# EAGLE board PATHS 1.1 PCB2 (EAGLE 6.5.0)
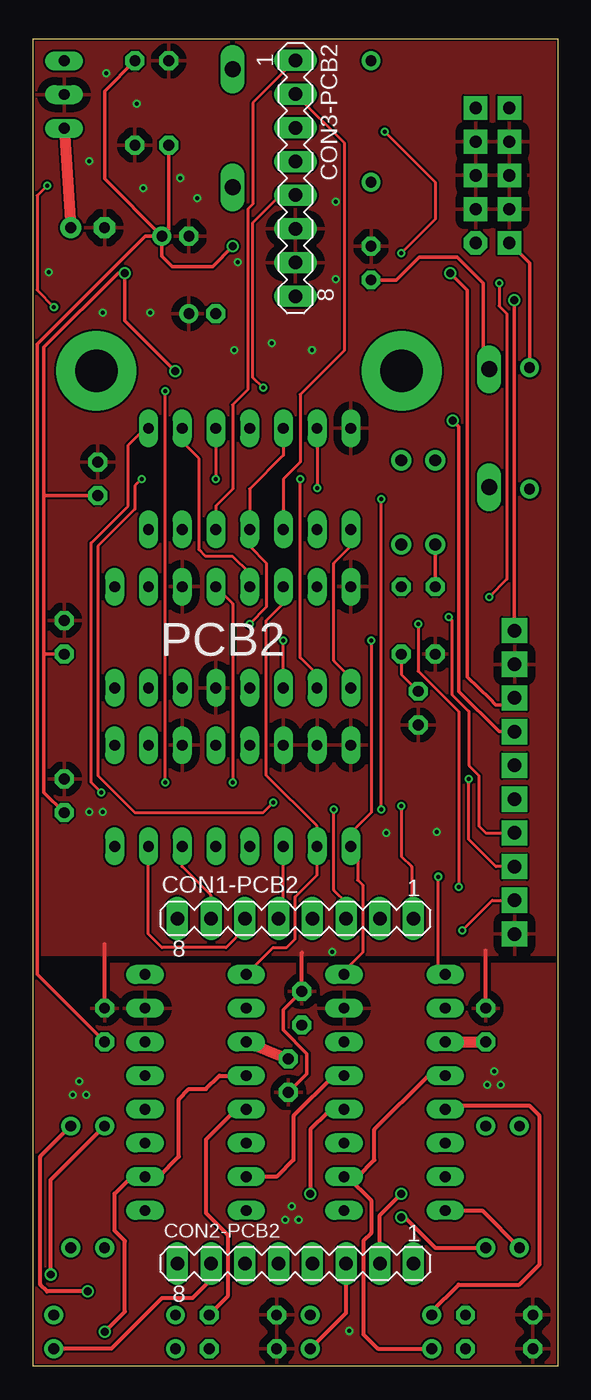
[diagram p0: board, top side]
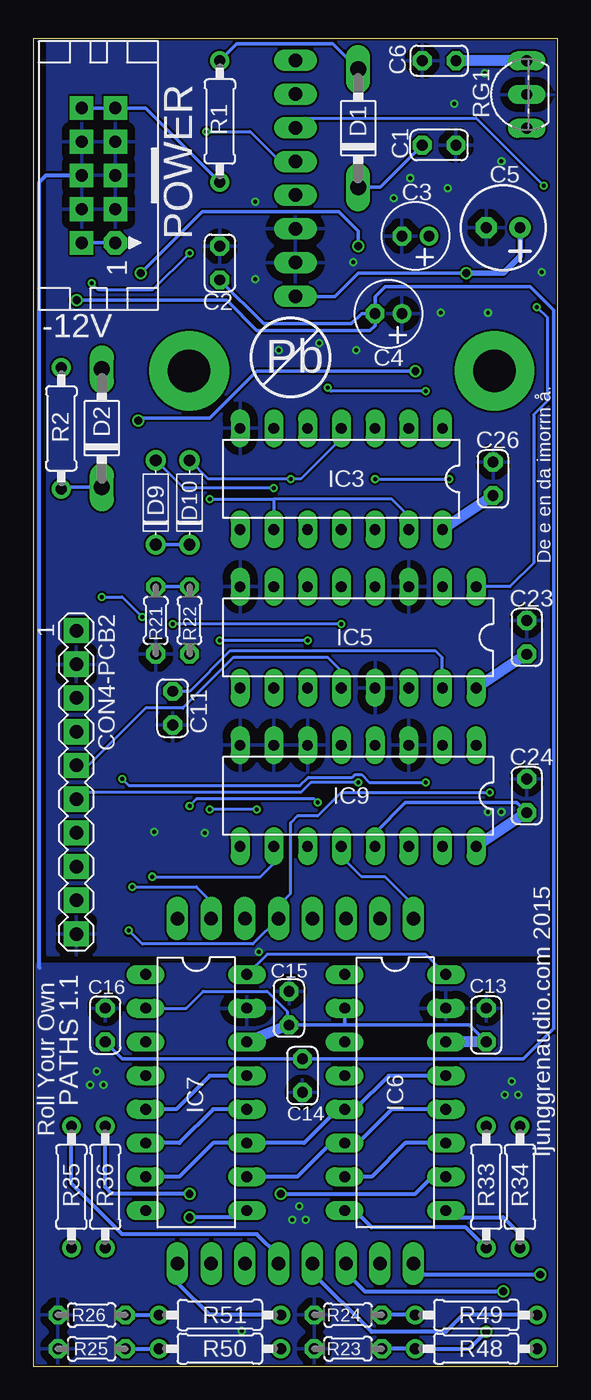
[diagram p1: board, bottom side, seen from below]

Size 39.5 x 100 mm. Coordinates in mm from the lower left corner, seen from the top.
Outline: 39.5,100 39.5,0 0,0 0,100 39.5,100
Copper layers (1*16): Top 0.035mm / dielectric 1.5mm / Bottom 0.035mm
Design rules "hackvana 12 mil pads 24 mil thermal": minimum track width 6mil, minimum drill 0.3mm, track to track 6mil, track to pad 6mil, pad to pad 6mil, via to via 6mil, smd to smd 0mil, copper to edge 6mil, drill to drill 6mil, minimum pad ring 12mil, minimum via ring 6mil, stop-mask expansion 2mil, vias tented up to drill 100mil, thermal gap 24mil
tRestrict: area 4.2,25.8 to 6.6,28.2; area 19,27.1 to 21.4,29.4; area 18,19.4 to 20.4,21.8; area 32.9,25.8 to 35.3,28.2; 9 lines
bRestrict: area 4.2,25.8 to 6.6,28.2; area 19,27.1 to 21.4,29.4; area 18,19.4 to 20.4,21.8; area 32.9,25.8 to 35.3,28.2; 1 lines

## Footprints (pad centres in the part's own frame; a part is rotated, then mirrored left to right if it is on the bottom)
C025-024X044 = drill 0.813 octagon: 1 -1.27,0; 2 1.27,0
E2-5 = drill 0.813 pad 1.27: + -1.016,0 | drill 0.813 pad 1.27 octagon: - 1.016,0
E2,5-6 = drill 0.813 pad 1.6: + -1.27,0 | drill 0.813 pad 1.6 octagon: - 1.27,0
MA08-1 = drill 1.016 long: 1 -8.89,0; 2 -6.35,0; 3 -3.81,0; 4 -1.27,0; 5 1.27,0; 6 3.81,0; 7 6.35,0; 8 8.89,0
MA10-1 = drill 1.016 pad 1.9 square: 1 -11.43,0; 2 -8.89,0; 3 -6.35,0; 4 -3.81,0; 5 -1.27,0; 6 1.27,0; 7 3.81,0; 8 6.35,0; 9 8.89,0; 10 11.43,0
DO41-7 = drill 1.2 pad 1.6 long: A 4.445,0; C -4.445,0
DO35-6 = drill 0.9: ANODE 3.175,0; CATHODE -3.175,0
DIL14 = drill 0.813 long: 1 -7.62,-3.81; 2 -5.08,-3.81; 3 -2.54,-3.81; 4 0,-3.81; 5 2.54,-3.81; 6 5.08,-3.81; 7 7.62,-3.81; 8 7.62,3.81; 9 5.08,3.81; 10 2.54,3.81; 11 0,3.81; 12 -2.54,3.81; 13 -5.08,3.81; 14 -7.62,3.81
DIL16 = drill 0.813 long: 1 -8.89,-3.81; 2 -6.35,-3.81; 3 -3.81,-3.81; 4 -1.27,-3.81; 5 1.27,-3.81; 6 3.81,-3.81; 7 6.35,-3.81; 8 8.89,-3.81; 9 8.89,3.81; 10 6.35,3.81; 11 3.81,3.81; 12 1.27,3.81; 13 -1.27,3.81; 14 -3.81,3.81; 15 -6.35,3.81; 16 -8.89,3.81
CON10L = drill 0.914 pad 1.778 octagon: 1 5.08,1.27 | drill 0.914 pad 1.778 square: 2 5.08,-1.27; 3 2.54,1.27; 4 2.54,-1.27; 5 0,1.27; 6 0,-1.27; 7 -2.54,1.27; 8 -2.54,-1.27; 9 -5.08,1.27; 10 -5.08,-1.27
0207/9 = drill 0.813: 1 -4.58,0; 2 4.58,0
0204/5 = drill 0.813 octagon: 1 -2.54,0; 2 2.54,0
TO92-LINE = drill 0.813 long: 1 2.54,0; 2 0,0; 3 -2.54,0

## Placement (x,y rotation side)
C1  100nF  [C025-024X044]  8.93,92 0 bottom
C2  100nF  [C025-024X044]  25.44,83.11 270 bottom
C3  10uF  [E2-5]  10.71,85.15 180 bottom
C4  10uF  [E2-5]  12.74,79.3 180 bottom
C5  100uF  [E2,5-6]  4.11,85.78 180 bottom
C6  100nF  [C025-024X044]  8.93,98.35 180 bottom
C11  15pF  [C025-024X044]  29,49.59 270 bottom
C13  100nF  [C025-024X044]  5.38,25.71 90 bottom
C14  100nF  [C025-024X044]  19.22,21.9 90 bottom
C15  100nF  [C025-024X044]  20.23,26.98 90 bottom
C16  100nF  [C025-024X044]  34.08,25.71 270 bottom
C23  100nF  [C025-024X044]  2.33,54.92 90 bottom
C24  100nF  [C025-024X044]  2.33,42.98 90 bottom
C26  100nF  [C025-024X044]  4.87,66.86 90 bottom
CON1-PCB2  [MA08-1]  19.75,33.74 180 top
CON2-PCB2  [MA08-1]  19.75,7.74 180 top
CON3-PCB2  [MA08-1]  19.75,89.5 270 top
CON4-PCB2  [MA10-1]  36.25,44 270 bottom
D1  1N5818  [DO41-7]  15.03,93.27 90 bottom
D2  1N5818  [DO41-7]  34.33,70.67 90 bottom
D9  1N4148  [DO35-6]  30.27,65.08 90 bottom
D10  1N4148  [DO35-6]  27.73,65.08 90 bottom
IC3  40106N  [DIL14]  16.3,66.86 180 bottom
IC5  4516N  [DIL16]  15.03,54.92 180 bottom
IC6  DG409DJ  [DIL16]  12.23,20.63 270 bottom
IC7  DG409DJ  [DIL16]  27.22,20.63 270 bottom
IC9  4052N  [DIL16]  15.03,42.98 180 bottom
POWER  [CON10L]  34.59,89.72 270 bottom
R1  10R  [0207/9]  25.44,93.78 90 bottom
R2  10R  [0207/9]  37.38,70.67 270 bottom
R21  22k  [0204/5]  30.27,56.19 90 bottom
R22  22k  [0204/5]  27.73,56.19 90 bottom
R23  100k  [0204/5]  15.79,1.33 0 bottom
R24  100k  [0204/5]  15.79,3.87 0 bottom
R25  100k  [0204/5]  35.09,1.33 0 bottom
R26  100k  [0204/5]  35.09,3.87 0 bottom
R33  430R  [0207/9]  5.38,13.52 90 bottom
R34  430R  [0207/9]  2.84,13.52 90 bottom
R35  430R  [0207/9]  36.62,13.52 90 bottom
R36  430R  [0207/9]  34.08,13.52 90 bottom
R48  430R  [0207/9]  6.14,1.33 180 bottom
R49  430R  [0207/9]  6.14,3.87 180 bottom
R50  430R  [0207/9]  25.44,1.33 180 bottom
R51  430R  [0207/9]  25.44,3.87 180 bottom
RG1  LM2931 5V  [TO92-LINE]  2.33,95.81 90 bottom

## Library data of the parts
C1-C6 C11 C13-C16 C23 C24 C26 D1 D2 D9 D10 IC3 IC5 IC9 R1 R2 R21-R26 R33-R36 R48-R51 RG1 = Roll Your Own
CON1-PCB2 CON2-PCB2 CON3-PCB2 CON4-PCB2 POWER = Roll Your Own; OC_FARNELL: unknown; OC_NEWARK: unknown
IC6 IC7 = maxim; MF: INTERSIL; MPN: DG409DJ; OC_FARNELL: 9664084; OC_NEWARK: 06F3963

## Nets
0V: C1.2 C2.1 C3.- C4.+ C5.- C6.2 C11.2 C13.2 C14.1 C15.2 C16.1 C23.2 C24.2 C26.2 CON3-PCB2.6 CON3-PCB2.7 CON4-PCB2.2 CON4-PCB2.10 IC3.7 IC5.3 IC5.8 IC5.13 IC6.15 IC7.15 IC9.3 IC9.6 IC9.7 IC9.8 POWER.3 POWER.4 POWER.5 POWER.6 POWER.7 POWER.8 R21.1 R23.1 R24.1 R25.1 R26.1 RG1.2
+5V: C5.+ C23.1 C24.1 C26.1 CON3-PCB2.8 CON4-PCB2.4 IC3.14 IC5.16 IC9.13 IC9.16 RG1.3
+12V: C1.1 C3.+ C6.1 C13.1 C15.1 CON4-PCB2.3 D1.C IC6.2 IC6.14 IC7.2 IC7.14 RG1.1
-12V: C2.2 C4.- C14.2 C16.2 CON4-PCB2.1 D2.A IC6.3 IC7.3
CV-MODE-2: CON3-PCB2.3 IC5.1
CV-RECTIFIED-IN-2: CON3-PCB2.4 CON4-PCB2.7
CV-STRAIGHT-IN-2: CON3-PCB2.5 CON4-PCB2.8
DVW4D: D9.ANODE IC3.6
FGDFS33: IC3.2 IC5.5
FSS44F: IC3.8 IC5.9
FWD-2: CON1-PCB2.1 IC3.3
HLD-2: CON1-PCB2.4 CON4-PCB2.9 IC3.1
IO1-2: CON2-PCB2.8 R33.2
IO2-2: CON2-PCB2.6 R34.2
IO3-2: CON2-PCB2.4 R35.2
IO4-2: CON2-PCB2.2 R36.2
L1-2: CON1-PCB2.8 IC9.12
L2-2: CON1-PCB2.7 IC9.14
L3-2: CON1-PCB2.6 IC9.15
L4-2: CON1-PCB2.5 IC9.11
N$1: IC5.11 IC6.16 IC7.16 IC9.9
N$2: IC5.6 IC6.1 IC7.1 IC9.10
N$4: C11.1 IC5.15 R22.1
N$5: IC6.9 R34.1
N$6: IC7.9 R36.1
N$9: IC7.8 R35.1
N$13: IC6.8 R33.1
N$22: POWER.1 POWER.2 R2.1
N$23: POWER.9 POWER.10 R1.1
N$24: D1.A R1.2
N$25: D2.C R2.2
N$39: D9.CATHODE D10.CATHODE R21.2 R22.2
N$42: IC6.6 IC6.12 IC7.4 IC7.10 R25.2 R50.2
N$48: IC6.7 IC6.11 IC7.5 IC7.13 R26.2 R51.2
N$56: IC6.5 IC6.13 IC7.7 IC7.11 R24.2 R49.2
N$57: IC6.4 IC6.10 IC7.6 IC7.12 R23.2 R48.2
OI1-2: CON2-PCB2.7 R48.1
OI2-2: CON2-PCB2.5 R49.1
OI3-2: CON2-PCB2.3 R50.1
OI4-2: CON2-PCB2.1 R51.1
P0-2: CON4-PCB2.6 IC5.4
P1-2: CON4-PCB2.5 IC5.12
RES-2: CON1-PCB2.3 IC3.9 IC3.13
RES-LED-2: CON3-PCB2.1 IC3.12
REV-2: CON1-PCB2.2 IC3.5 IC3.11
REV-LED-2: CON3-PCB2.2 IC3.10
XBGE4: D10.ANODE IC3.4 IC5.10

## Tracks (layer width: path | path; a pad name or v marks a point on that pad's centre or on a via)
0V  (via drill 0.3)
  Top 0.254: C14.1 20.62,22.03 20.62,23.55 18.84,25.33 18.84,26.85 C15.2
  Top 0.305: C13.2 5.38,31.81 | C16.1 34.08,31.3 | C15.2 20.23,31.17
  Bottom 0.305: 39.03,30.03 39.03,89.21 38.52,89.72 POWER.6
  other vias: 23.79,2.66 19.98,11.04 35.22,21.2 3.47,21.46 15.15,76.57 8.8,79.37 12.36,88 11.09,89.53 4.23,90.8 1.19,82.42 7.79,95.12 17.95,77.08 21,76.57 5.25,79.37 8.3,88.77 5.5,97.4 22.77,81.91 22.77,87.75 15.41,83.18 5.25,41.78 4.23,41.78 30.39,40.25 26.59,40.19 22.52,31.23 34.71,22.22 34.2,21.2 19.47,12.06 18.96,11.04 3.98,20.44 2.96,20.44
  pour Top: -0.72,30.28 39.92,30.28 39.92,-0.2 -0.72,-0.2
  pour Bottom: -0.21,30.28 39.92,30.28 39.92,-0.45 -0.21,-0.45
  pour Top: -0.21,31.04 39.92,31.04 39.92,100.13 -0.21,100.13
  pour Bottom: -0.21,31.04 38.4,31.04 38.4,100.13 -0.21,100.13
+5V  (via drill 0.6)
  Top 0.254: C23.1 0.8,53.65 | 0.8,53.65 0.8,43.24 C24.1 | 0.8,53.65 0.8,65.59 | 0.8,65.59 0.8,76.76 6.39,82.35 v6.9,82.35 6.9,78.8 v10.71,74.99 | C26.1 0.8,65.59 | v31.6,71.24 32.05,70.8 32.05,50.86 35.09,47.81 CON4-PCB2.4
  Top 0.813: RG1.3 C5.+
  Bottom 0.254: IC9.13 13.76,40.19 11.47,42.47 3.09,42.47 C24.1 | v6.9,82.35 15.03,82.35 16.81,80.57 19.71,80.57 CON3-PCB2.8 | v31.6,71.24 31.41,71.43 26.2,71.43 22.65,74.99 v10.71,74.99
  Bottom 0.406: v6.9,82.35 4.11,82.35 2.84,83.62 C5.+
  Bottom 0.813: C24.1 IC9.16 | C23.1 IC5.16 | C26.1 IC3.14
+12V  (via drill 0.6)
  Top 0.254: C13.1 0.3,29.52 0.3,77.02 8.42,85.15 C3.+ | C6.1 5.38,96.07 5.38,89.46 C3.+ | C1.1 10.2,85.65 C3.+ | v31.41,82.35 32.68,81.08 32.68,51.94 34.37,50.31 34.84,49.84 35.86,49.84 36.25,50.23 CON4-PCB2.3 | v15.03,84.38 13.5,82.86 10.46,82.86 9.69,83.62 C3.+
  Bottom 0.22: IC7.2 27.98,26.98 26.71,28.25 21.89,28.25 20.36,26.73 20.36,25.84 C15.1
  Bottom 0.254: C15.1 16.04,25.71 | 16.04,25.71 6.65,25.71 C13.1 | D1.C 13.38,88.83 C1.1 | v31.41,82.35 26.78,86.99 16.49,86.99 15.03,85.53 v15.03,84.38 | IC6.2 16.04,25.71
  Bottom 0.813: C13.1 IC6.14 | C15.1 IC7.14 | RG1.1 C6.1
-12V  (via drill 0.6)
  Top 0.254: v36.24,80.32 36.24,55.91 36.25,55.9 CON4-PCB2.1 | D2.A 33.89,75.56 33.89,81.59 31.92,83.56 29.06,83.56 27.35,81.84 C2.2
  Top 0.813: IC6.3 C14.2 | IC7.3 C16.2
  Bottom 0.254: C4.- 13.76,80.57 13,81.34 2.07,81.34 0.3,79.56 0.3,25.46 2.58,23.17 C14.2 32.81,23.17 C16.2 | C2.2 22.14,78.54 15.54,78.54 14.77,79.3 C4.- | v36.24,80.32 24.93,80.32 22.65,78.03 14.14,78.03 13.76,78.42 C4.-
CV-MODE-2  (via drill 0.3)
  Top 0.22: v1.06,88.96 0.3,88.19 0.3,81.08 v1.57,79.81
  Bottom 0.22: CON3-PCB2.3 19.02,94.04 6.14,94.04 v1.06,88.96 | v1.57,79.81 0.8,79.05 0.8,72.7 1.82,71.68 1.82,60.51 3.6,58.73 IC5.1
CV-RECTIFIED-IN-2  (via drill 0.3)
  Top 0.22: v27.73,83.88 30.27,86.42 30.27,89.21 v26.46,93.02 | v35.09,81.59 35.09,79.88 35.67,79.3 35.67,59.3 v34.33,57.97 | v31.28,56.44 31.54,56.19 31.54,50.6 32.81,49.33 32.81,45.27 33.57,44.51 33.57,40.7 34.08,40.19 36.21,40.19
  Top 0.254: 36.21,40.19 CON4-PCB2.7
  Bottom 0.22: 19.79,90.73 CON3-PCB2.4 19.97,90.99 21.12,90.99 23.16,93.02 v26.46,93.02 | v27.73,83.88 30.52,81.08 34.59,81.08 v35.09,81.59 | v34.33,57.97 32.81,57.97 v31.28,56.44
CV-STRAIGHT-IN-2  (via drill 0.3)
  Top 0.22: 36.21,37.65 34.84,37.65 32.81,39.68 v32.81,44.25 | v9.95,44 v9.95,73.46 | v17.31,73.72 16.55,74.48 16.55,86.16 18.62,88.23 CON3-PCB2.5
  Top 0.254: CON4-PCB2.8 36.21,37.65
  Bottom 0.22: v32.81,44.25 32.3,43.74 19.41,43.74 18.77,44.38 15.47,44.38 15.28,44.57 14.77,44.57 14.2,44 v9.95,44 | v9.95,73.46 17.06,73.46 v17.31,73.72
DVW4D  (via drill 0.3)
  Top 0.22: IC3.6 v21.38,66.16
  Bottom 0.22: v21.38,66.16 28.17,66.16 D9.ANODE
FGDFS33
  Top 0.22: IC5.5 16.3,59.75 15.03,61.02 13,61.02 12.49,61.52 12.49,68.38 11.22,69.65 IC3.2
FSS44F
  Top 0.22: IC3.8 23.92,61.78 22.65,60.51 22.65,53.14 23.92,51.87 IC5.9
FWD-2  (via drill 0.3)
  Top 0.22: IC3.3 v13.76,66.86 | v8.17,66.86 7.66,66.35 7.66,64.57 4.87,61.78 4.87,44.51 7.66,41.71 17.31,41.71 v18.08,42.47 | v27.73,42.22 27.73,38.41 28.49,37.65 28.49,33.89 CON1-PCB2.1
  Bottom 0.22: v13.76,66.86 v8.17,66.86 | v18.08,42.47 18.33,42.73 27.22,42.73 v27.73,42.22
HLD-2  (via drill 0.3)
  Top 0.22: v5.12,43.24 4.36,44 4.36,62.03 7.15,64.83 7.15,69.4 8.42,70.67 IC3.1 | v32.3,32.82 34.59,35.11 CON4-PCB2.9
  Bottom 0.22: v5.12,43.24 16.3,43.24 18.08,41.46 19.6,41.46 20.11,40.95 20.11,35.62 20.87,34.85 20.87,33.89 CON1-PCB2.4 22.95,31.81 31.28,31.81 v32.3,32.82
IO1-2  (via drill 0.6)
  Top 0.305: v1.31,6.91 1.31,14.03 R33.2
  Bottom 0.305: CON2-PCB2.8 10.86,7.32 10.46,6.91 v1.31,6.91
IO2-2  (via drill 0.6)
  Top 0.305: v4.11,5.64 1.06,5.64 0.55,6.15 0.55,15.81 R34.2
  Bottom 0.305: CON2-PCB2.6 15.94,7.06 14.52,5.64 v4.11,5.64
IO3-2
  Bottom 0.305: CON2-PCB2.4 21.02,8.33 22.65,9.96 32.81,9.96 36.62,13.77 R35.2
IO4-2  (via drill 0.6)
  Top 0.305: CON2-PCB2.2 26.1,11.38 v27.73,13.01
  Bottom 0.305: v27.73,13.01 33.57,13.01 34.08,13.52 R36.2
L1-2
  Bottom 0.22: CON1-PCB2.8 10.86,34.75 13,36.89 14.77,36.89 16.3,38.41 IC9.12
L2-2
  Top 0.22: CON1-PCB2.7 13.4,35.47 11.22,37.65 IC9.14
L3-2
  Top 0.22: CON1-PCB2.6 15.94,32.97 14.52,31.55 9.69,31.55 8.68,32.57 IC9.15
L4-2
  Top 0.22: CON1-PCB2.5 18.84,34.1 IC9.11
N$1  (via drill 0.3)
  Top 0.22: IC7.16 23.41,29.77 24.81,31.17 24.81,36.25 24.43,36.63 24.43,38.66 IC9.9 23.92,40.19 25.44,41.71 v25.44,54.67 | IC5.11 v18.84,54.67
  Bottom 0.22: IC6.16 9.95,31.04 21.89,31.04 IC7.16 | v18.84,54.67 v25.44,54.67
N$2  (via drill 0.3)
  Top 0.22: IC6.1 18.08,31.55 19.09,31.55 19.73,32.19 19.73,35.36 21.38,37.01 IC9.10 21.38,40.7 17.57,44.51 17.57,56.19 18.84,57.46 IC5.6 | IC7.1 30.52,29.52 v30.52,36.89
  Bottom 0.22: v30.52,36.89 22.39,36.89 21.38,37.9 IC9.10
N$4
  Top 0.22: R22.1 27.73,52.13 C11.1
  Bottom 0.22: IC5.15 8.68,53.4 9.19,53.9 24.68,53.9 27.73,50.86 C11.1
N$5
  Bottom 0.305: IC6.9 7.92,11.23 4.11,11.23 2.84,9.96 R34.1
N$6  (via drill 0.6)
  Top 0.305: v27.73,11.23 27.98,11.23 30.28,8.94 R36.1
  Bottom 0.305: IC7.9 23.92,11.23 v27.73,11.23
N$9
  Top 0.305: IC7.8 33.82,11.74 R35.1
N$13
  Bottom 0.305: R33.1 6.91,10.47 14.01,10.47 15.28,11.74 IC6.8
N$22
  Top 0.254: POWER.2 37.38,83.11 R2.1
  Bottom 0.254: POWER.1 POWER.2
N$23
  Bottom 0.254: R1.1 31.04,94.8 POWER.9 POWER.10
N$24
  Bottom 0.254: D1.A 16.93,99.62 24.18,99.62 R1.2
N$25
  Bottom 0.254: R2.2 37.24,66.22 D2.C
N$39
  Top 0.254: R21.2 D9.CATHODE
  Bottom 0.254: D10.CATHODE D9.CATHODE | R22.2 R21.2
N$42
  Top 0.305: IC7.10 23.66,14.28 | 23.66,14.28 25.44,12.5 25.44,10.03 24.87,9.45 24.87,2.4 25.95,1.33 R50.2 | 23.66,14.28 24.43,14.28 25.7,15.55 25.7,17.84 29.76,21.9 IC7.4
  Bottom 0.305: R25.2 R50.2 | IC6.12 12.49,19.36 15.03,16.82 IC6.6 17.06,16.82 19.6,14.28 IC7.10
N$48
  Top 0.305: R51.2 30.02,4.13 32.05,6.15 36.62,6.15 38.14,7.68 38.14,18.85 37.38,19.61 31.28,19.61 IC7.5 | IC7.13 22.65,21.9 19.6,18.85 19.6,15.55 18.33,14.28 IC6.7
  Bottom 0.305: R26.2 R51.2 | IC6.11 11.47,16.82 14.01,14.28 IC6.7 | IC7.13 26.2,21.9 28.74,19.36 IC7.5
N$49  (via drill 3.2 pad 6)
  other vias: 4.75,75
N$50  (via drill 3.2 pad 6)
  other vias: 27.75,75
N$56
  Top 0.305: IC6.5 15.28,19.36 13,17.07 13,11.55 14.65,9.9 14.65,5.26 R24.2
  Bottom 0.305: R49.2 R24.2 | IC6.13 12.74,21.9 15.28,19.36 IC6.5 16.55,19.36 19.09,16.82 IC7.11 25.95,16.82 28.49,14.28 IC7.7
N$57  (via drill 0.6)
  Top 0.305: v5.38,2.6 6.9,4.12 6.9,9.45 6.14,10.22 6.14,13.01 7.41,14.28 IC6.10 9.44,14.28 10.96,15.8 10.96,20.12 11.73,20.88 13,20.88 14.01,21.9 IC6.4 | IC7.12 23.16,19.11 22.14,19.11 20.87,17.84 v20.87,13.01
  Bottom 0.305: R23.2 R48.2 6.65,1.33 v5.38,2.6 | v20.87,13.01 10.71,13.01 9.44,14.28 IC6.10 | IC7.12 25.95,19.36 28.49,16.82 IC7.6
OI1-2
  Top 0.305: CON2-PCB2.7 13.4,6.56 11.98,5.14 9.69,5.14 5.88,1.33 R48.1
OI2-2
  Bottom 0.305: R49.1 7.15,3.87 8.42,2.6 14.01,2.6 18.58,7.17 18.58,7.64 CON2-PCB2.5
OI3-2
  Top 0.305: R50.1 23.56,4.02 CON2-PCB2.3
OI4-2
  Bottom 0.305: R51.1 26.2,3.87 28.49,6.15 28.49,7.59 CON2-PCB2.1
P0-2  (via drill 0.3)
  Top 0.22: IC5.4 15.03,57.46 v15.03,44
  Bottom 0.22: v15.03,44 18.58,44 19.35,43.24 35.7,43.24
  Bottom 0.254: 35.7,43.24 36.21,42.73 CON4-PCB2.6
P1-2
  Bottom 0.22: IC5.12 16.3,52.38 17.31,53.4 24.43,53.4 28.24,49.59 31.03,49.59 35.39,45.23 35.86,44.76
  Bottom 0.254: 35.86,44.76 36.11,44.76 36.25,44.9 CON4-PCB2.5
RES-2  (via drill 0.3)
  Top 0.22: CON1-PCB2.3 23.66,33.84 23.66,34.85 22.65,35.87 v22.65,41.97 | v26.2,41.97 v26.2,65.33
  Bottom 0.22: v22.65,41.97 v26.2,41.97 | v26.2,65.33 21.38,65.33 | 21.38,65.33 IC3.9 | IC3.13 11.22,64.06 12.49,65.33 21.38,65.33
RES-LED-2
  Top 0.22: CON3-PCB2.1 16.55,95.19 16.55,87.56 16.17,87.18 16.17,73.59 15.03,72.45 15.03,66.1 13.76,64.83 IC3.12
REV-2  (via drill 0.3)
  Top 0.22: IC3.5 18.84,68.64 16.3,66.1 IC3.11 16.3,61.78 17.57,60.51 17.57,57.21 v16.3,55.94 | v29,55.94 29,52.38 32.05,49.33 v32.05,36.12
  Bottom 0.22: v16.3,55.94 v29,55.94 | v32.05,36.12 27.22,36.12 26.1,35 CON1-PCB2.2
REV-LED-2
  Top 0.22: CON3-PCB2.2 23.41,92.19 23.41,76.51 20.11,73.21 20.11,68.13 18.84,66.86 IC3.10
XBGE4  (via drill 0.3)
  Top 0.22: IC5.10 21.38,52.13 20.11,53.4 v20.11,66.86
  Bottom 0.22: D10.ANODE 26.33,66.86 v20.11,66.86 19.35,66.86 16.3,69.91 IC3.4

## Text on the board
tPlace: PCB2
bPlace: -12V | Pb | De e en da imorrn å. | PATHS 1.1 | Roll Your Own | ljunggrenaudio.com 2015